# Altium PCB BOARD.PcbDoc (part 2 of 2)
Units mm, origin at the board's own origin, x right, y up, seen from the top; angles counter-clockwise.
Board outline 55 x 60 mm, 2 copper layers (Top Layer, Bottom Layer), stack 1.18 mm thick; 81 components, 77 nets, 348 pads, 271 vias.
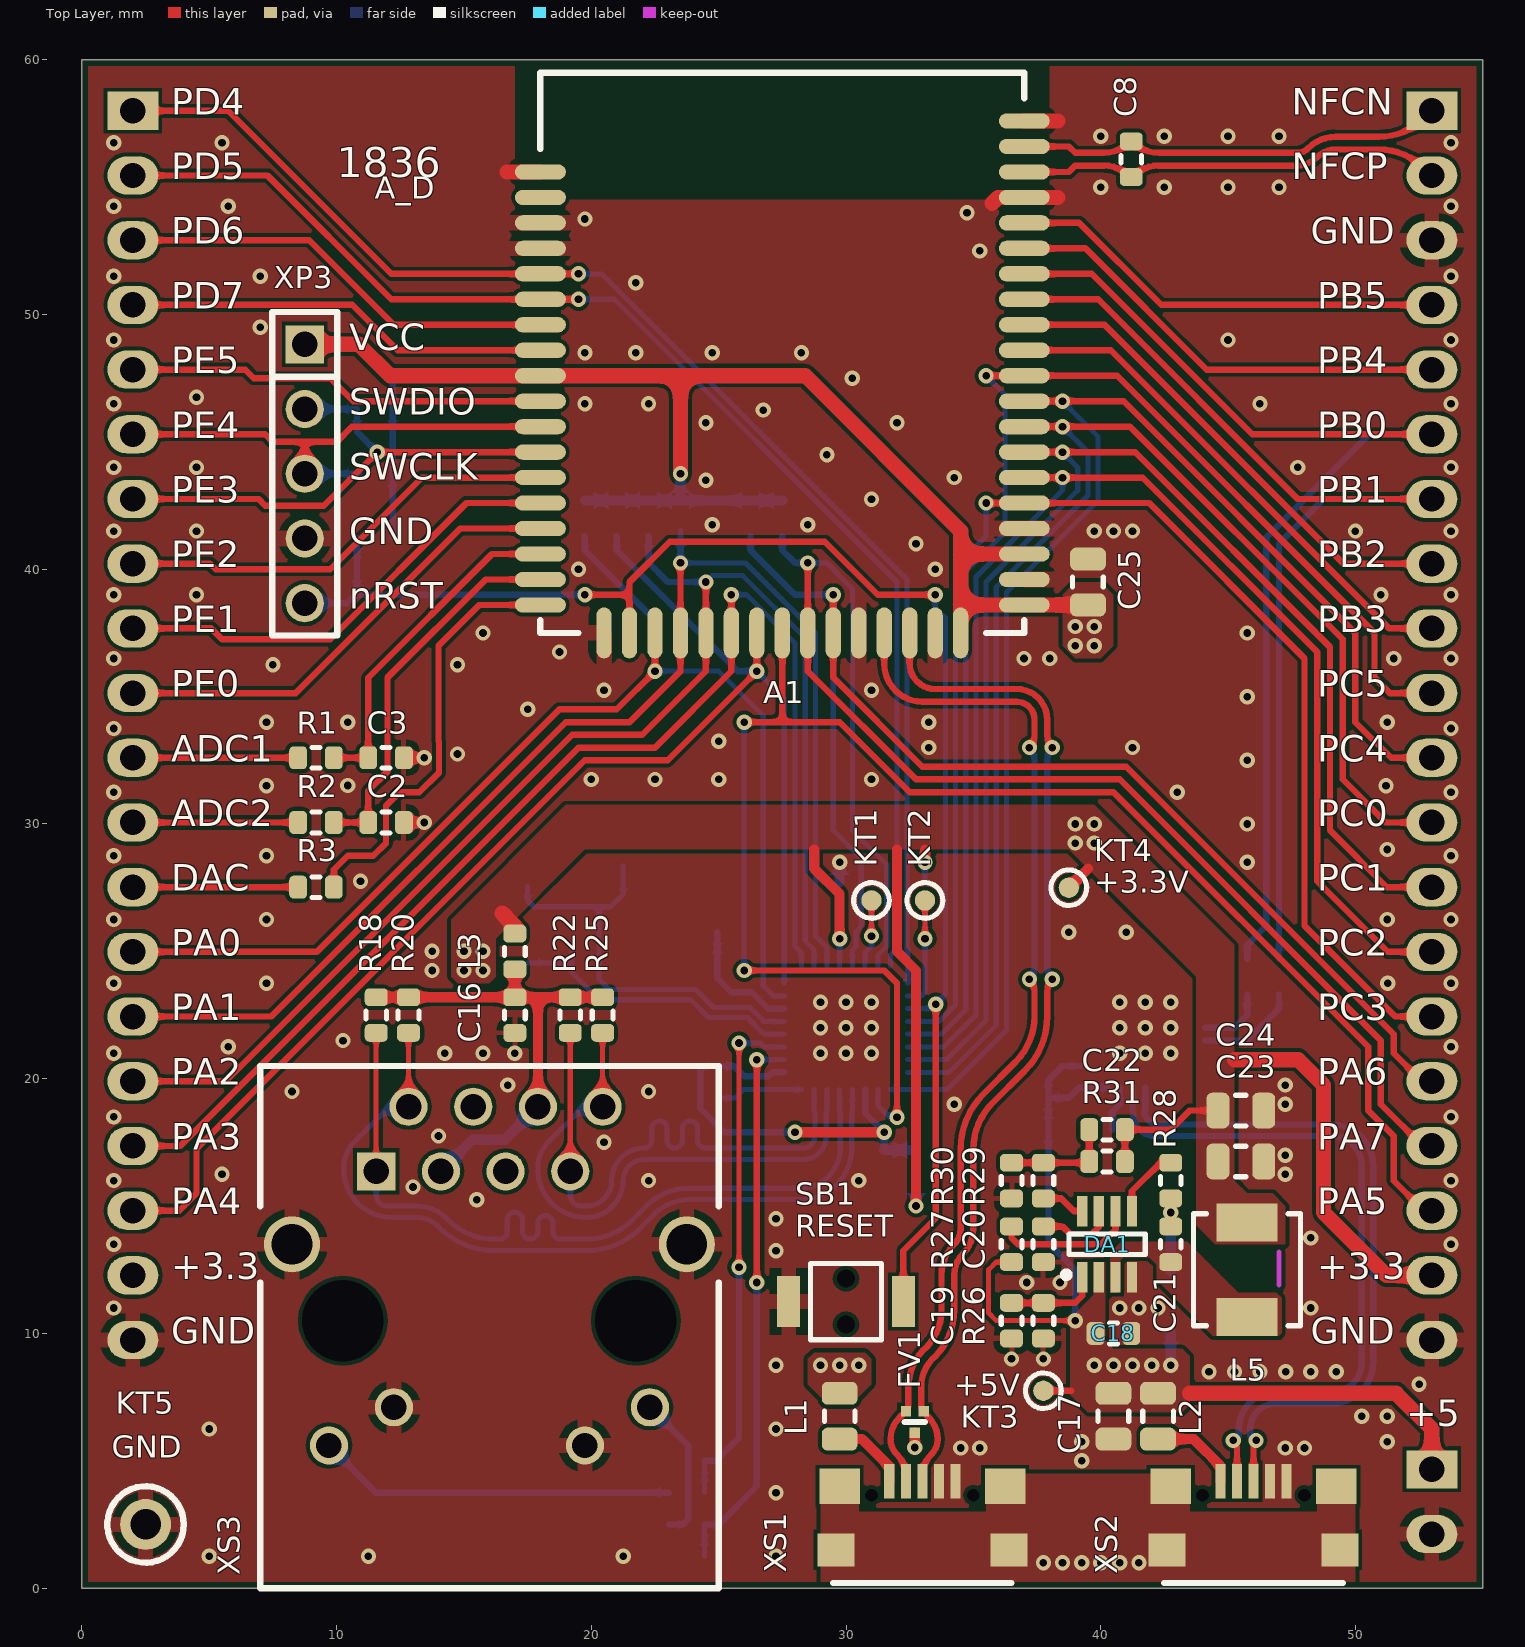
[diagram p0: Top Layer view]

## Via types
v1: diameter 0.6, hole 0.3, Top Layer to Bottom Layer, tented both sides, 271 vias

## Nets (pads, with @x,y where several pads share a name; then routed paths per layer and width w, separated by ;. In a path a pad name is that pad's centre, name@x,y a point inside that pad or via, vN(x,y) a via of type N, cw(c..) or ccw(c..) an arc to the next point about the centre after c; other vN are vias at no path point) (continued)
VCC5P0: (continued)
  other v1: 29,8.75 29.75,8.75 30.5,8.75 39.75,8.75 40.5,8.75 41.25,8.75 42,8.75
pads on no net: DD1.1 DD1.2 DD1.9 DD1.10 DD1.11 DD1.12 DD1.13 DD1.14 DD1.15 DD1.16 DD1.17 DD1.18 DD1.19 DD1.20 DD1.21 DD1.22 DD1.23 DD1.24 DD1.27 DD1.28 SB1.4 XS1.0 XS2.0 XS3.0 XS3.4 XS3.5 ZQ1.2 ZQ1.4

## Polygon pours and split planes (outlines as drawn)
GND on Top Layer "Top Layer-GND" (solid, remove dead copper, pour order 30): 0,0 55,0 55,60 0,60
EARTH on Top Layer "Top Layer-EARTH" (solid, pour order 24): 29,4.5 29,0 50,0 50,4.5 48.5,4.5 48.5,3 43.5,3 43.5,4.5 35.5,4.5 35.5,3 30.5,3 30.5,4.5
VCC3P3 on Top Layer "Top Layer-VCC3P3" (solid, pour order 22): 38.5,39 39,39.5 40,39.5 40.5,39 40.5,37 40,36.5 39,36.5 38.5,37
VCC3P3 on Top Layer "Top Layer-VCC3P3 1" (solid, pour order 10): 45.25,19.5 45.25,25.25 39.75,30.75 19,30.75 14.5,26.25 14.5,24 14.75,23.75 16,23.75 16.25,24 16.25,25.5 19.75,29 38.75,29 43.75,24 43.75,19.5
VCC3P3 on Top Layer "Top Layer-VCC3P3 2" (solid, pour order 8): 44.5,13.5 43.75,14.25 43.75,19.5 45.25,19.5 45.25,16 45.75,15.5 46.75,15.5 47.25,15 47.25,13.5
VCC5P0 on Top Layer "Top Layer-VCC5P0" (solid, pour order 6): 29.25,7.25 28.5,8 28.5,9 28.75,9.25 30.75,9.25 31,9 31,8 30.25,7.25
VCC5P0 on Top Layer "Top Layer-VCC5P0 1" (solid, pour order 2): 39.725,12.8 40.175,12.8 40.175,9.725 40.5,9.4 43.2,9.4 43.5,9.1 43.5,7.2 43.2,6.9 39.5,6.9 38.8,7.6 38.8,10.6 39.725,11.525
NetC21_2 on Top Layer "Top Layer-NetC21_2" (solid, pour order 0): 40.375,11.6 40.375,13.175 40.8,13.6 43.4,13.6 45.4,11.6 46.9,11.6 47.1,11.4 47.1,9.9 44.4,9.9 42.2,12.1 42.2,12.7 41.9,13 40.9,13 40.775,12.875 40.775,11.6
GND on Bottom Layer "Bottom Layer-GND" (solid, remove dead copper, pour order 28): 0,60 55,60 55,0 0,0
EARTH on Bottom Layer "Bottom Layer-EARTH" (solid, pour order 26): 37.25,0 37.25,1.75 38,2.5 41.25,2.5 42,1.75 42,0
VCC3P3 on Bottom Layer "Bottom Layer-VCC3P3" (solid, pour order 20): 38.75,28.75 38.5,29 38.5,38 38.75,38.25 40,38.25 40.25,38 40.25,29 40,28.75
VCC3P3 on Bottom Layer "Bottom Layer-VCC3P3 1" (solid, pour order 16): 14.5,25.25 14.75,25.5 16,25.5 16.25,25.25 16.25,24 3.75,11.5 1.75,11.5 1.75,13 3.5,13 14.5,24
VCC5P0 on Bottom Layer "Bottom Layer-VCC5P0" (solid, pour order 4): 28.75,9.25 28.5,9 28.5,8 29.25,7.25 42.5,7.25 43.25,8 43.25,9 43,9.25 39.5,9.25 39.25,9 39.25,8.5 39,8.25 31.5,8.25 31,8.75 31,9 30.75,9.25

## Keep-outs
Top Layer:
  lines w0.2: 47,11.9 47,13.2

## Silkscreen, mask and mechanical layers (free items; w line width, h text height)
Top Overlay:
  text "PD4" at 3.5,57.5 h1.8
  text "NFCN" at 47.5,57.5 h1.8
  text "1836" at 10,55 h2
  text "PD5" at 3.5,54.96 h1.8
  text "NFCP" at 47.5,54.96 h1.8
  text "A_D" at 11.5,54.25 h1.5
  text "PD6" at 3.5,52.42 h1.8
  text "GND" at 48.25,52.42 h1.8
  text "PD7" at 3.5,49.88 h1.8
  text "PB5" at 48.5,49.88 h1.8
  text "VCC" at 10.5,48.25 h1.8
  text "PE5" at 3.5,47.34 h1.8
  text "PB4" at 48.5,47.34 h1.8
  text "SWDIO" at 10.5,45.71 h1.8
  text "PE4" at 3.5,44.8 h1.8
  text "PB0" at 48.5,44.8 h1.8
  text "SWCLK" at 10.5,43.17 h1.8
  text "PE3" at 3.5,42.26 h1.8
  text "PB1" at 48.5,42.26 h1.8
  text "GND" at 10.5,40.63 h1.8
  text "PE2" at 3.5,39.72 h1.8
  text "PB2" at 48.5,39.72 h1.8
  text "nRST" at 10.5,38.09 h1.8
  text "PE1" at 3.5,37.18 h1.8
  text "PB3" at 48.5,37.18 h1.8
  text "PE0" at 3.5,34.64 h1.8
  text "PC5" at 48.5,34.64 h1.8
  text "ADC1" at 3.5,32.1 h1.8
  text "PC4" at 48.5,32.1 h1.8
  text "ADC2" at 3.5,29.56 h1.8
  text "PC0" at 48.5,29.56 h1.8
  text "DAC" at 3.5,27.02 h1.8
  text "PC1" at 48.5,27.02 h1.8
  text "PA0" at 3.5,24.48 h1.8
  text "PC2" at 48.5,24.48 h1.8
  text "PA1" at 3.5,21.94 h1.8
  text "PC3" at 48.5,21.94 h1.8
  text "PA2" at 3.5,19.4 h1.8
  text "PA6" at 48.5,19.4 h1.8
  text "PA3" at 3.5,16.86 h1.8
  text "PA7" at 48.5,16.86 h1.8
  text "PA4" at 3.5,14.32 h1.8
  text "PA5" at 48.5,14.32 h1.8
  text "+3.3" at 3.5,11.78 h1.8
  text "+3.3" at 48.5,11.78 h1.8
  text "GND" at 3.5,9.24 h1.8
  text "GND" at 48.25,9.24 h1.8
  text "+5" at 52,6 h1.8
Bottom Overlay:
  text "PD4" at 6.5,57.5 h1.8
  text "NFCN" at 51.5,57.5 h1.8
  text "RTL8195AM Dev.board" at 40,55 h2
  text "PD5" at 6.5,54.96 h1.8
  text "NFCP" at 51.5,54.96 h1.8
  text "PD6" at 6.5,52.42 h1.8
  text "GND" at 51.5,52.42 h1.8
  text "PD7" at 6.5,49.88 h1.8
  text "PB5" at 51.5,49.88 h1.8
  text "PE5" at 6.25,47.34 h1.8
  text "PB4" at 51.5,47.34 h1.8
  text "PE4" at 6.25,44.8 h1.8
  text "PB0" at 51.5,44.8 h1.8
  text "PE3" at 6.25,42.26 h1.8
  text "PB1" at 51.5,42.26 h1.8
  text "PE2" at 6.25,39.72 h1.8
  text "PB2" at 51.5,39.72 h1.8
  text "PE1" at 6.25,37.18 h1.8
  text "PB3" at 51.5,37.18 h1.8
  text "PE0" at 6.25,34.64 h1.8
  text "PC5" at 51.5,34.64 h1.8
  text "ADC1" at 7.5,32.1 h1.8
  text "PC4" at 51.5,32.1 h1.8
  text "ADC2" at 7.5,29.56 h1.8
  text "PC0" at 51.5,29.56 h1.8
  text "DAC" at 6.75,27.02 h1.8
  text "PC1" at 51.5,27.02 h1.8
  text "PA0" at 6.5,24.48 h1.8
  text "PC2" at 51.5,24.48 h1.8
  text "PA1" at 6.25,21.94 h1.8
  text "PC3" at 51.5,21.94 h1.8
  text "PA2" at 6.5,19.4 h1.8
  text "PA6" at 51.5,19.4 h1.8
  text "PA3" at 6.5,16.86 h1.8
  text "PA7" at 51.5,16.86 h1.8
  text "PA4" at 6.5,14.32 h1.8
  text "PA5" at 51.5,14.32 h1.8
  text "+3.3" at 6.5,11.78 h1.8
  text "+3.3" at 51.5,11.78 h1.8
  text "GND" at 6.75,9.24 h1.8
  text "GND" at 51.5,9.24 h1.8
  text "ETH" at 17.5,1.25 h1.8
  text "DEV" at 34.5,1.25 h1.8
  text "LOG" at 47.5,1.25 h1.8
1 - Board Outline:
  the board outline again, w0.1